# Altium PCB Palletto_PCB.PcbDoc
Units mm, origin at the board's own origin, x right, y up, seen from the top; angles counter-clockwise.
Board outline 270.89 x 250.57 mm, 2 copper layers (Top Layer, Bottom Layer); 58 components, 83 nets, 338 pads, 0 vias.
Unrouted connection lines stored in the file: 9.
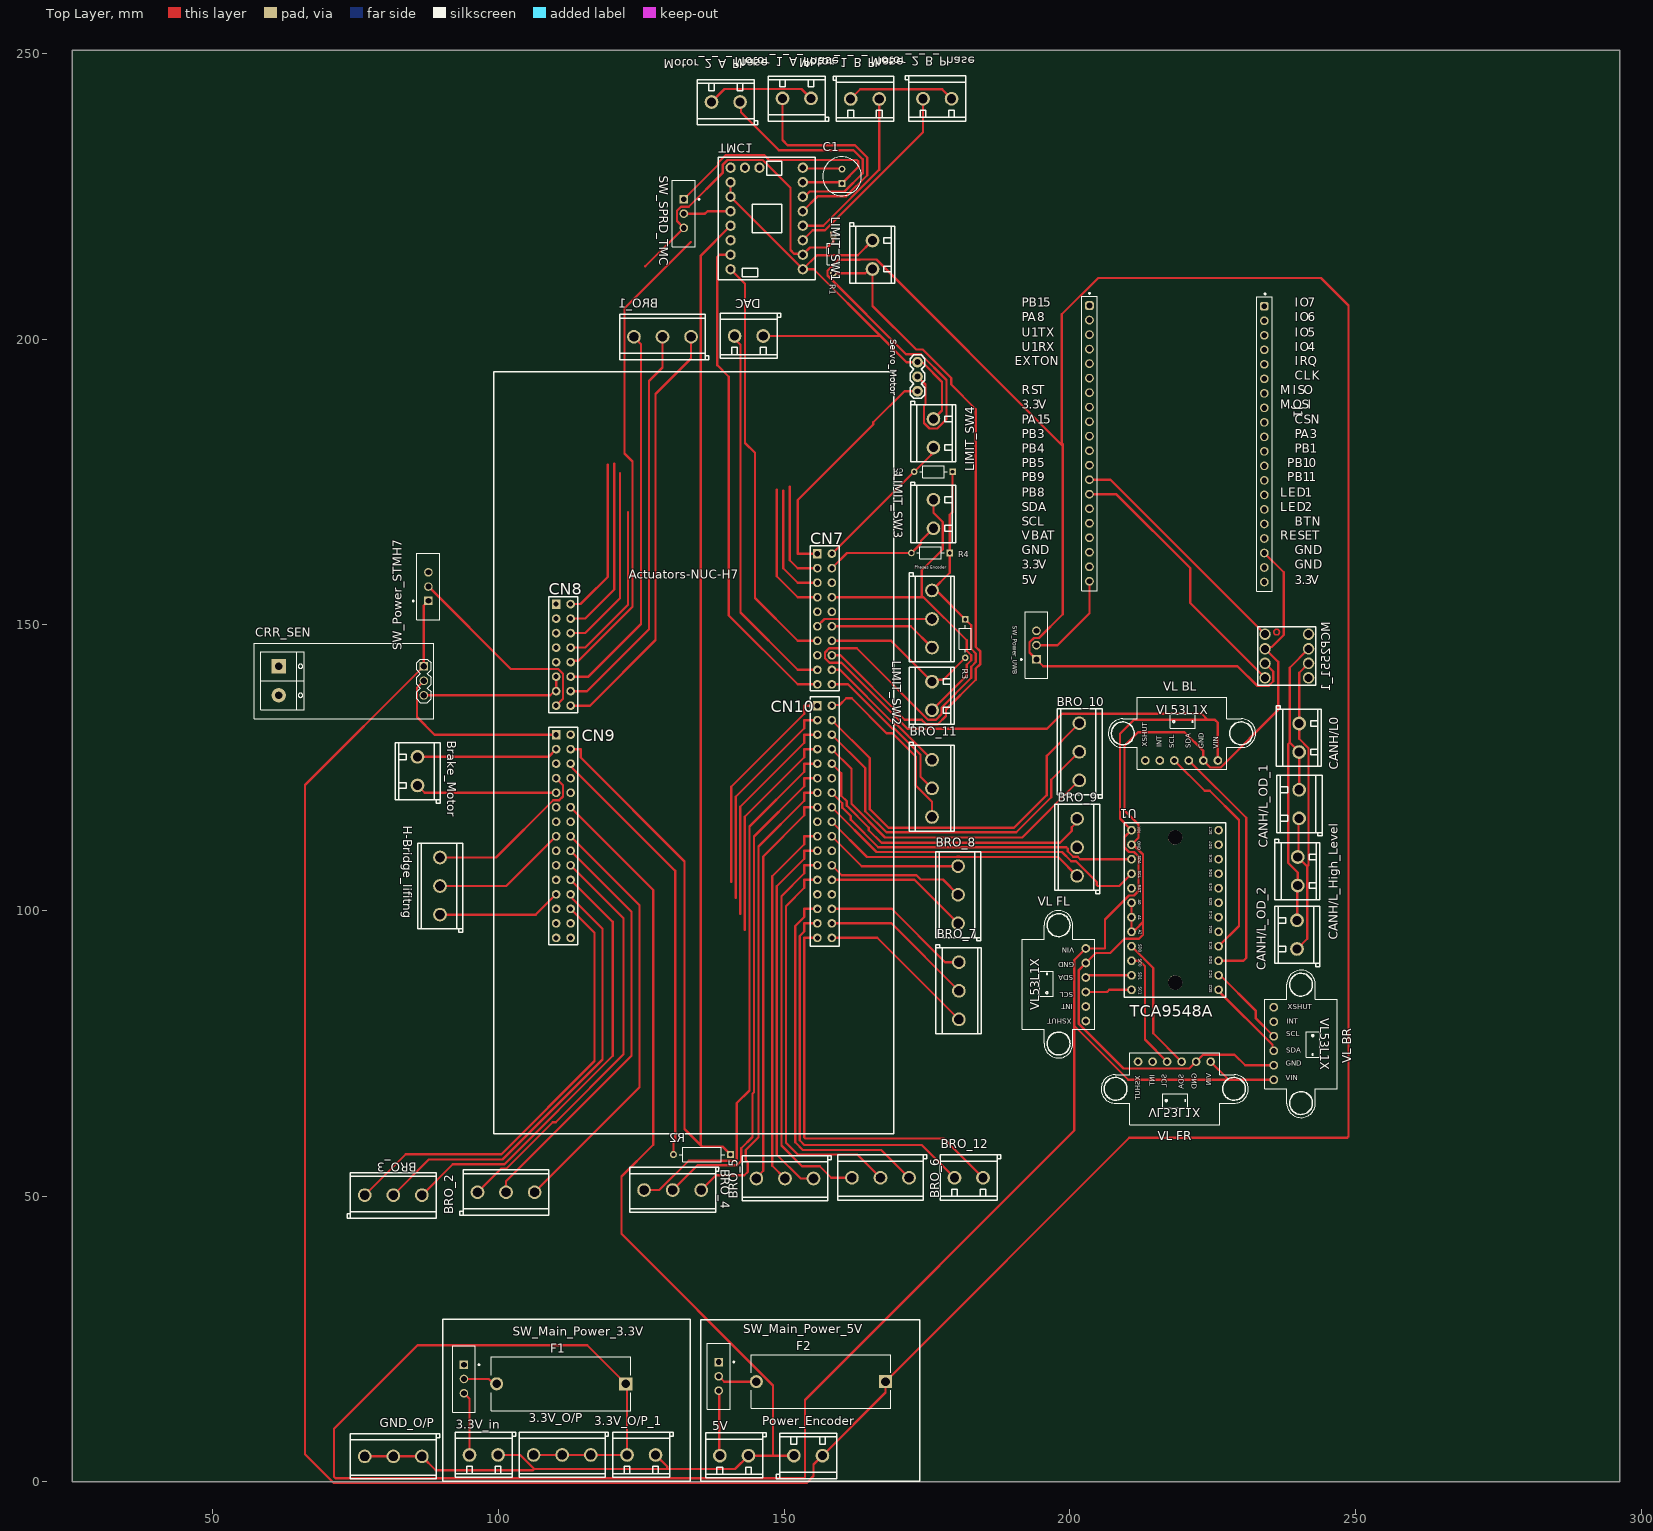
[diagram p0: Top Layer view]
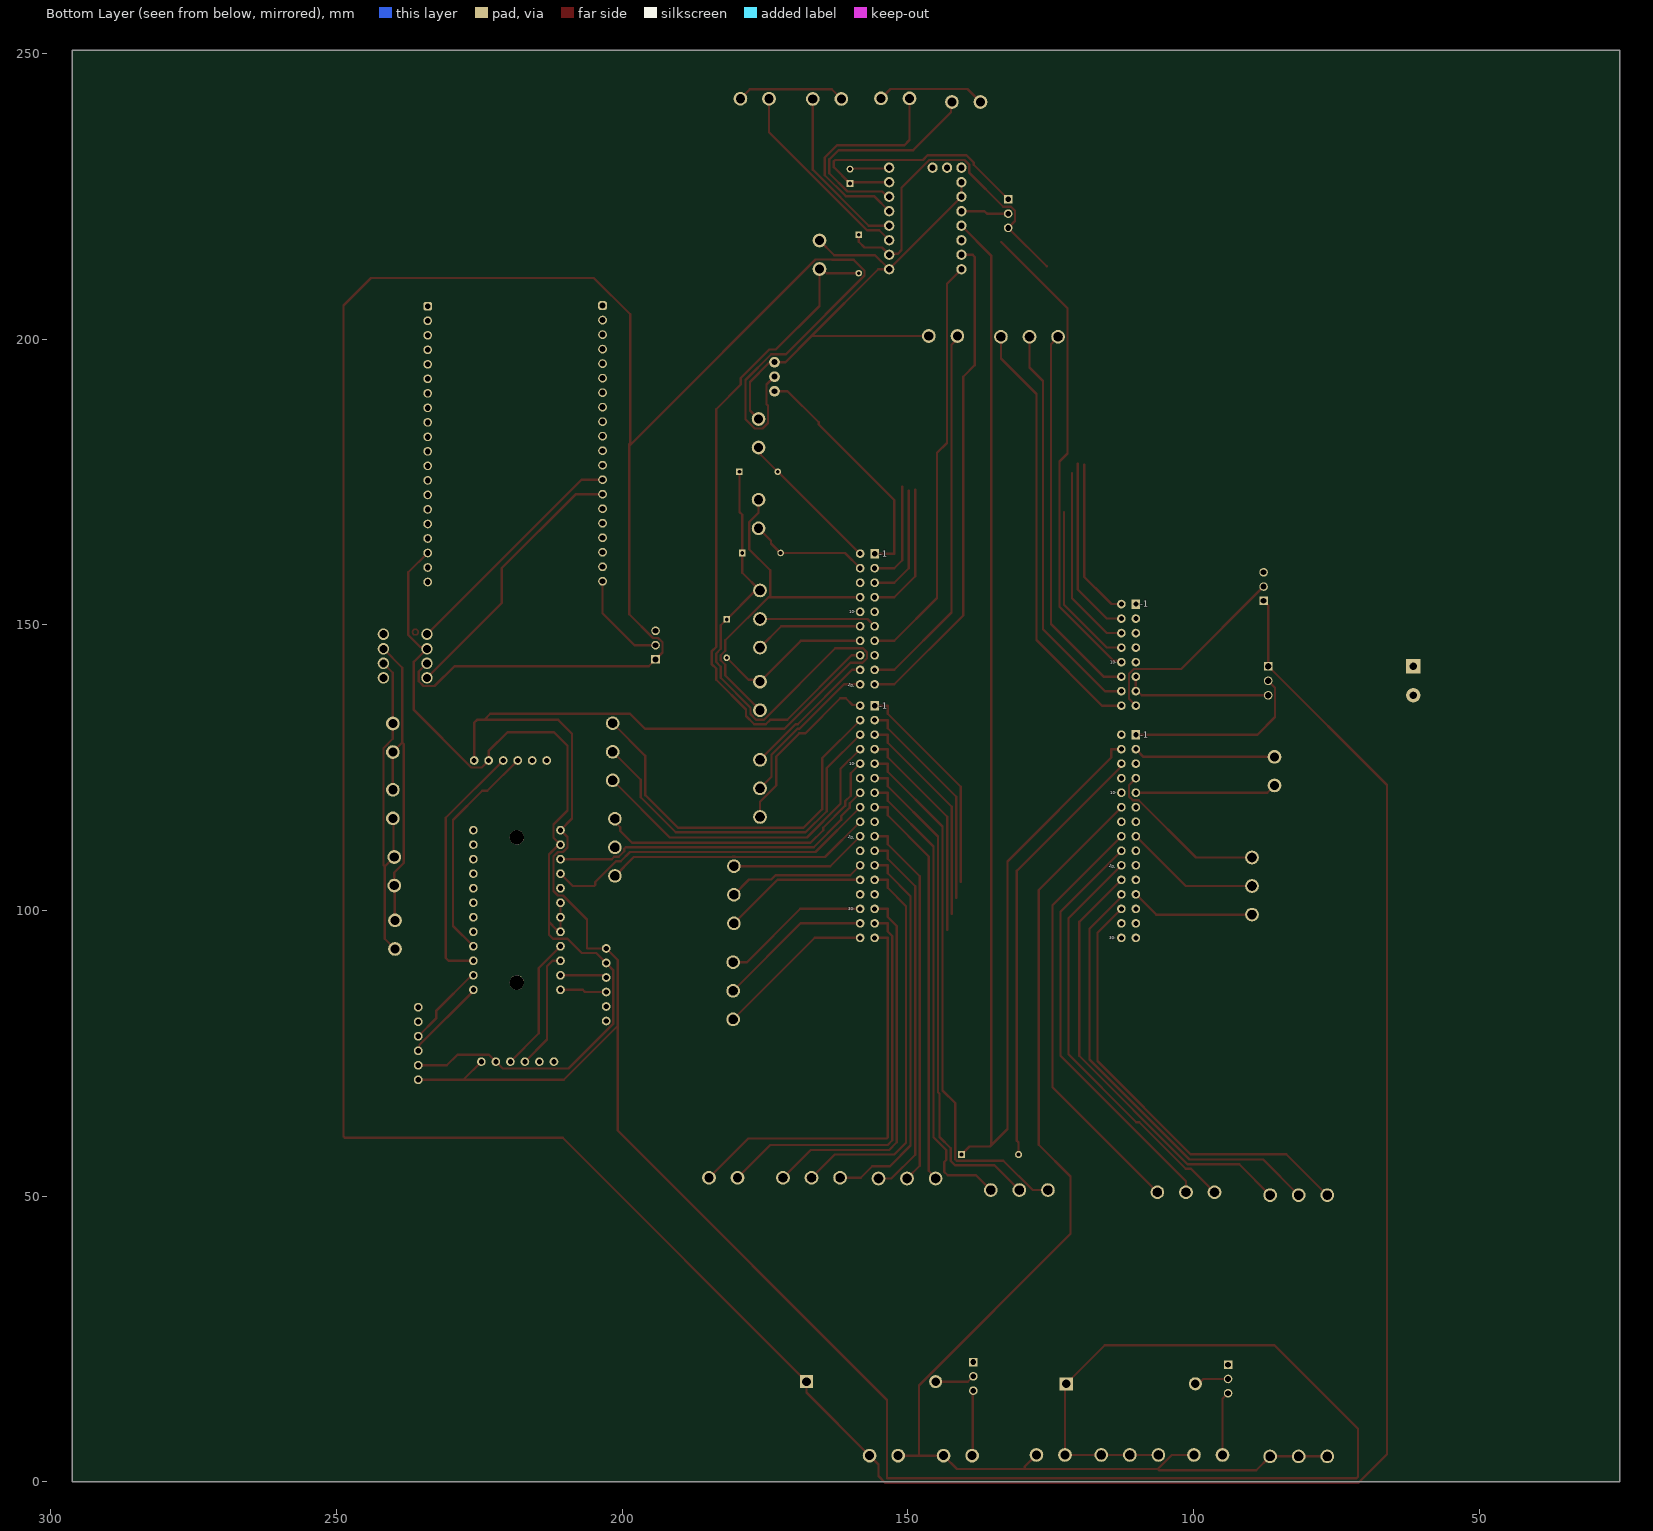
[diagram p1: Bottom Layer view, seen from below]

## Layer stack, top to bottom
Top Solder: solder mask 0.0102, Solder Resist, Dk 3.5
Top Layer: signal copper 0.0356
Dielectric 1: dielectric 0.32, FR-4, Dk 4.8
Bottom Layer: signal copper 0.0356
Bottom Solder: solder mask 0.0102, Solder Resist, Dk 3.5

## Board outline
25.4,250.571 296.291,250.571 296.291,0 25.4,0

## Design rules (kind name [scope] priority, off if disabled: settings)
Clearance [All] p1: gap=0.254 ignorepadtopadclearanceinfootprint=FALSE except(0.4: Arc-Arc Arc-Track Track-Track)
PolygonConnect [All] p1: connectstyle=Relief reliefconductorwidth=0.254 reliefentries=4 polygonreliefangle="90 Angle" airgapwidth=0.254
RoutingLayers [All] p1: top layer_v5=TRUE bottom layer_v5=FALSE
RoutingVias [All] p1: holewidth=0.6 width=1.4 viastyle="Through Hole" minholewidth=0.6 minwidth=1.4 maxholewidth=0.711 maxwidth=1.524
SolderMaskExpansion [All] p1: expansion=0.102 istentingtop=FALSE
Width [All] p1: maxlimit=0.762 minlimit=0.4 preferedwidth=0.4 minimp=50.000000 maximp=50.000000 favimp=50.000000
29 further rules are at their usual default settings.

## Classes and differential pairs
component class Actuators_Schematic: 3.3V_in 3.3V_O/P 3.3V_O/P_1 5V Brake_Motor BRO_1 BRO_2 BRO_3 BRO_4 BRO_5 BRO_6 BRO_7 BRO_8 BRO_9 BRO_10 BRO_11 BRO_12 CANH/L0 CANH/L_High_Level CANH/L_OD_1 CANH/L_OD_2 DAC F1 F2 GND_O/P H-Bridge_lifitng LIMIT_SW1 LIMIT_SW2 LIMIT_SW3 LIMIT_SW4 MCP2551_1 "Phases Encoder" Power_Encoder R1 R3 R4 R5 SW_Main_Power_3.3V SW_Main_Power_5V
component class Sensors_Schematic: C1 CRR_SEN J1 Motor_1_A_Phase Motor_1_B_Phase Motor_2_A_Phase Motor_2_B_Phase Servo_Motor SW_Power_UWB SW_SPRD_TMC TMC1 U1 "VL BL" "VL BR" "VL FL" "VL FR"
component class STM32H755_Breakout_Schematic: Actuators-NUC-H7 R2 SW_Power_STMH7

## Components (designator, comment, footprint, x,y, rotation, side; value= is the part's Value field where it differs from the comment)
3.3V_in "3.3V_In" CONN-TH_P5.00_KF126-5.0-2P 97.449,4.699 r0 top
3.3V_O/P "3P-Terminal" CONN-TH_3P-P5.00_KF126-5.0-3P 111.172,4.699 r0 top
3.3V_O/P_1 "KF126-5.0-2P" CONN-TH_P5.00_KF126-5.0-2P 125.022,4.699 r0 top
5V "KF126-5.0-2P" CONN-TH_P5.00_KF126-5.0-2P 141.264,4.572 r0 top
Actuators-NUC-H7 "NUCLEO-H755ZI-ZIO" NUCLEO-H7 102.489,120.599 r0 top
Brake_Motor "KF126-5.0-2P" CONN-TH_P5.00_KF126-5.0-2P 85.852,124.373 r270 top
BRO_1 "3P-Terminal" CONN-TH_3P-P5.00_KF126-5.0-3P 128.731,200.406 r0 top
BRO_2 "3P-Terminal" CONN-TH_3P-P5.00_KF126-5.0-3P 101.346,50.673 r180 top
BRO_3 "3P-Terminal" CONN-TH_3P-P5.00_KF126-5.0-3P 81.614,50.165 r180 top
BRO_4 "3P-Terminal" CONN-TH_3P-P5.00_KF126-5.0-3P 130.509,51.054 r0 top
BRO_5 "3P-Terminal" CONN-TH_3P-P5.00_KF126-5.0-3P 150.161,53.086 r0 top
BRO_6 "3P-Terminal" CONN-TH_3P-P5.00_KF126-5.0-3P 166.878,53.213 r0 top
BRO_7 "3P-Terminal" CONN-TH_3P-P5.00_KF126-5.0-3P 180.594,85.932 r90 top
BRO_8 "3P-Terminal" CONN-TH_3P-P5.00_KF126-5.0-3P 180.467,102.743 r270 top
BRO_9 "3P-Terminal" CONN-TH_3P-P5.00_KF126-5.0-3P 201.295,111.045 r270 top
BRO_10 "3P-Terminal" CONN-TH_3P-P5.00_KF126-5.0-3P 201.676,127.762 r270 top
BRO_11 "3P-Terminal" CONN-TH_3P-P5.00_KF126-5.0-3P 175.895,121.365 r90 top
BRO_12 "KF126-5.0-2P" CONN-TH_P5.00_KF126-5.0-2P 182.332,53.213 r0 top
C1 "EEUFM1E101B" FP-RAD-TH-D_6_3_0_5-L_11-MFG 160.147,228.493 r90 top
CANH/L0 "KF126-5.0-2P" CONN-TH_P5.00_KF126-5.0-2P 240.157,130.215 r90 top
CANH/L_High_Level "KF126-5.0-2P" CONN-TH_P5.00_KF126-5.0-2P 239.903,106.847 r90 top
CANH/L_OD_1 "KF126-5.0-2P" CONN-TH_P5.00_KF126-5.0-2P 240.157,118.618 r270 top
CANH/L_OD_2 "KF126-5.0-2P" CONN-TH_P5.00_KF126-5.0-2P 239.776,95.758 r270 top
CRR_SEN "CURRENT-SENSOR-ACS712#IC" CURRENT-SENSOR-ACS712#IC 72.985,140.189 r0 top
DAC "KF126-5.0-2P" CONN-TH_P5.00_KF126-5.0-2P 143.851,200.533 r0 top
F1 "0PTF0078P" FP-0PTF0078P-MFG 110.995,17.145 r180 top
F2 "0PTF0078P" FP-0PTF0078P-MFG 156.461,17.526 r180 top
GND_O/P "3P-Terminal" CONN-TH_3P-P5.00_KF126-5.0-3P 81.614,4.445 r0 top
H-Bridge_lifitng "3P-Terminal" CONN-TH_3P-P5.00_KF126-5.0-3P 89.789,104.267 r270 top
J1 "1" 61302011821 212.471,186.817 r0 top
LIMIT_SW1 "LIMIT_SW" CONN-TH_P5.00_KF126-5.0-2P 165.481,214.757 r90 top
LIMIT_SW2 "LIMIT_SW" CONN-TH_P5.00_KF126-5.0-2P 175.895,137.541 r270 top
LIMIT_SW3 "LIMIT_SW" CONN-TH_P5.00_KF126-5.0-2P 176.149,169.378 r90 top
LIMIT_SW4 "LIMIT_SW" CONN-TH_P5.00_KF126-5.0-2P 176.149,183.515 r90 top
MCP2551_1 "8 PIN DIP SOCKET" "DIP 8 PIN SOCKET" 237.998,144.526 r270 top
Motor_1_A_Phase "" CONN-TH_P5.00_KF126-5.0-2P 152.226,242.125 r0 top
Motor_1_B_Phase "" CONN-TH_P5.00_KF126-5.0-2P 164.164,242.025 r180 top
Motor_2_A_Phase "" CONN-TH_P5.00_KF126-5.0-2P 139.813,241.49 r0 top
Motor_2_B_Phase "" CONN-TH_P5.00_KF126-5.0-2P 176.824,242.062 r180 top
"Phases Encoder" "3P-Terminal" CONN-TH_3P-P5.00_KF126-5.0-3P 175.895,151.003 r90 top
Power_Encoder "KF126-5.0-2P" CONN-TH_P5.00_KF126-5.0-2P 154.218,4.572 r180 top
R1 "10K" FP-MFR-12-MFG 158.623,214.884 r270 top
R2 "FMP100JT-52-1K" FP-FMP100-MFG 135.636,57.277 r180 top
R3 "10K" FP-MFR-12-MFG 181.737,147.574 r270 top
R4 "10K" FP-MFR-12-MFG 175.641,162.56 r180 top
R5 "10K" FP-MFR-12-MFG 176.149,176.784 r180 top
Servo_Motor "SMALL_SERVO" 1X03 173.355,190.881 r90 top
SW_Main_Power_3.3V "EG1218" ESWI-EG1218_V 93.98,17.994 r270 top
SW_Main_Power_5V "EG1218" ESWI-EG1218_V 138.557,18.455 r270 top
SW_Power_STMH7 "EG1218" ESWI-EG1218_V 87.757,156.678 r90 top
SW_Power_UWB "EG1218" ESWI-EG1218_V 194.183,146.431 r90 top
SW_SPRD_TMC "EG1218" ESWI-EG1218_V 132.461,221.956 r270 top
TMC1 "TMC2209 Socket" COMM-TH_TMC2209SILENTSTEPSTICK 146.969,221.107 r0 top
U1 "TCA9548A" TCA9548A 218.44,100.076 r0 top
"VL BL" "VL53L1X" VL53L1X_BREAKOUT 213.233,126.238 r0 top
"VL BR" "VL53L1X" VL53L1X_BREAKOUT 235.712,83.058 r270 top
"VL FL" "VL53L1X" VL53L1X_BREAKOUT 202.819,80.645 r90 top
"VL FR" "VL53L1X" VL53L1X_BREAKOUT 211.963,73.533 r0 top

## Footprints (in the part's own frame and the unit in brackets; to place one, negate y for a bottom-side part, rotate by r counter-clockwise, add the part's x,y. Pads: shape width x height; smd on the part's side, far side on the other; paste and mask are expansions set on the pad)
1X03 [mil]
  round 74 hole 40 paste-99999 mask+2: 1(0,0) 2(100,0) 3(200,0)
  silkscreen extent -50,-50 250,50
61302011821 [mm] "Socket Header, Pitch 2.54 mm, THT, Vertical, single row, 20p"
  rrect50% 1.52x1.52 hole 1.02: 1(-9.017,19.05) 21(21.59,18.923)
  round 1.52 hole 1.02: 2(-9.017,16.51) 3(-9.017,13.97) 4(-9.017,11.43) 5(-9.017,8.89) 6(-9.017,6.35) 7(-9.017,3.81) 8(-9.017,1.27) 9(-9.017,-1.27) 10(-9.017,-3.81) 11(-9.017,-6.35) 12(-9.017,-8.89) 13(-9.017,-11.43) 14(-9.017,-13.97) 15(-9.017,-16.51) 16(-9.017,-19.05) 17(-9.017,-21.59) 18(-9.017,-24.13) 19(-9.017,-26.67) 20(-9.017,-29.21) 22(21.59,16.383) 23(21.59,13.843) 24(21.59,11.303) 25(21.59,8.763) 26(21.59,6.223) 27(21.59,3.683) 28(21.59,1.143) 29(21.59,-1.397) 30(21.59,-3.937) 31(21.59,-6.477) 32(21.59,-9.017) 33(21.59,-11.557) 34(21.59,-14.097) 35(21.59,-16.637) 36(21.59,-19.177) 37(21.59,-21.717) 38(21.59,-24.257) 39(21.59,-26.797) 40(21.59,-29.337)
  silkscreen extent -10.37,-30.93 22.97,21.3, body extent -10.27,-30.73 22.86,20.57, height 8.55
COMM-TH_TMC2209SILENTSTEPSTICK [mm]
  round 1.8 hole 1.1 paste-2539.97 mask+0.051: 1(6.32,-8.89) 2(6.32,-6.35) 3(6.32,-3.81) 4(6.32,-1.27) 5(6.32,1.27) 6(6.32,3.81) 7(6.32,6.35) 8(6.32,8.89) 9(-6.32,-8.89) 10(-6.32,-6.35) 11(-6.32,-3.81) 12(-6.32,-1.27) 13(-6.32,1.27) 14(-6.32,3.81) 15(-6.32,6.35) 16(-6.32,8.89) 17(-3.81,8.89) 18(-1.27,8.89)
  silkscreen extent -8.5,-10.7 8.5,10.7
CONN-TH_3P-P5.00_KF126-5.0-3P [mm]
  round 2.4 hole 1.6 slot 1.605 at 0 deg paste-2539.97 mask+0.051: 1(-5,0) 2(0,0) 3(5,0)
  silkscreen extent -7.5,-3.9 8.09,4
CONN-TH_P5.00_KF126-5.0-2P [mm]
  round 2.4 hole 1.6 paste-2539.97 mask+0.102: 1(-2.5,0) 2(2.5,0)
  silkscreen extent -5,-3.9 5.59,4
CURRENT-SENSOR-ACS712#IC [mm]
  rect 1.508x1.508 hole 1 paste-2539.97 mask+0.051: 1(13.97,2.54)
  round 1.508 hole 1 paste-2539.97 mask+0.051: 2(13.97,0) 3(13.97,-2.54)
  rect 2.5x2.5 hole 1.2 slot 1.205 at 0 deg paste-2539.97 mask+0.051: P1.1(-11.43,2.54)
  round 2.5 hole 1.2 slot 1.205 at 0 deg paste-2539.97 mask+0.051: P1.2(-11.43,-2.54)
  silkscreen extent -15.75,-6.6 15.75,6.6
"DIP 8 PIN SOCKET" [mm]
  round 2 hole 1.4 paste-2539.97 mask+0.102: 1(-3.81,-3.81) 2(-1.27,-3.81) 3(1.27,-3.81) 4(3.81,-3.81) 5(3.81,3.81) 6(1.27,3.81) 7(-1.27,3.81) 8(-3.81,3.81)
  Top Layer circle w0.254: c-4.191,-1.778 r0.5
  silkscreen extent -5.08,-5.08 5.08,5.08
ESWI-EG1218_V [mm] "THD, 3-Leads, Body 11.6x4mm, Pitch 2.5mm"
  rect 1.5x1.5 hole 1: 1(-2.5,0)
  round 1.5 hole 1: 2(0,0) 3(2.5,0)
  silkscreen extent -5.8,-2 5.8,2.78, body extent -5.8,-2 5.8,2, height 7.4
FP-0PTF0078P-MFG [mm]
  rect 2.3x2.3 hole 1.5 paste-2539.97 mask+0: 1(-11.3,0)
  round 2.3 hole 1.5 paste-2539.97 mask+0: 2(11.3,0)
  silkscreen extent -12.2,-4.7 12.2,4.7, body extent -12.2,-4.7 12.2,4.7, height 11.5
FP-FMP100-MFG [mm]
  rect 1.25x1.25 hole 0.75 paste-2539.97 mask+0: 1(-5,0)
  round 1.25 hole 0.75 paste-2539.97 mask+0: 2(5,0)
  silkscreen extent -3.98,-1.3 3.98,1.3, body extent -5.28,-1.29 5.28,1.29, height 2.6
FP-MFR-12-MFG [mm]
  rect 1.15x1.15 hole 0.65 paste-2539.97 mask+0: 1(-3.35,0)
  round 1.15 hole 0.65 paste-2539.97 mask+0: 2(3.35,0)
  silkscreen extent -2.38,-1.05 2.38,1.05, body extent -4.03,-1.15 4.03,1.15, height 0.25
FP-RAD-TH-D_6_3_0_5-L_11-MFG [mm]
  rect 1.2x1.2 hole 0.7 paste-2539.97 mask+0: 1(-1.25,0)
  round 1.2 hole 0.7 paste-2539.97 mask+0: 2(1.25,0)
  silkscreen extent -3.4,-3.4 3.4,3.4, body extent -3.5,-3.5 3.5,3.5, height 0.25
NUCLEO-H7 [mm]
  rect 1.52x1.65 hole 0.914 paste-2539.97 mask+0.051: 145(7.62,33.02) 161(7.62,10.16) 191(53.34,41.834) 211(53.34,15.24)
  round 1.52 hole 0.89 paste-2539.97 mask+0.051: 146(10.16,33.02) 147(7.62,30.48) 148(10.16,30.48) 149(7.62,27.94) 150(10.16,27.94) 151(7.62,25.4) 152(10.16,25.4) 153(7.62,22.86) 154(10.16,22.86) 155(7.62,20.32) 156(10.16,20.32) 157(7.62,17.78) 158(10.16,17.78) 159(7.62,15.24) 160(10.16,15.24) 162(10.16,10.16) 163(7.62,7.62) 164(10.16,7.62) 165(7.62,5.08) 166(10.16,5.08) 167(7.62,2.54) 168(10.16,2.54) 169(7.62,0) 170(10.16,0) 171(7.62,-2.54) 172(10.16,-2.54) 173(7.62,-5.08) 174(10.16,-5.08) 175(7.62,-7.62) 176(10.16,-7.62) 177(7.62,-10.16) 178(10.16,-10.16) 179(7.62,-12.7) 180(10.16,-12.7) 181(7.62,-15.24) 182(10.16,-15.24) 183(7.62,-17.78) 184(10.16,-17.78) 185(7.62,-20.32) 186(10.16,-20.32) 187(7.62,-22.86) 188(10.16,-22.86) 189(7.62,-25.4) 190(10.16,-25.4) 192(55.88,41.834) 193(53.34,39.294) 194(55.88,39.294) 195(53.34,36.754) 196(55.88,36.754) 197(53.34,34.214) 198(55.88,34.214) 199(53.34,31.674) 200(55.88,31.674) 201(53.34,29.134) 202(55.88,29.134) 203(53.34,26.594) 204(55.88,26.594) 205(53.34,24.054) 206(55.88,24.054) 207(53.34,21.514) 208(55.88,21.514) 209(53.34,18.974) 210(55.88,18.974) 212(55.88,15.24) 213(53.34,12.7) 214(55.88,12.7) 215(53.34,10.16) 216(55.88,10.16) 217(53.34,7.62) 218(55.88,7.62) 219(53.34,5.08) 220(55.88,5.08) 221(53.34,2.54) 222(55.88,2.54) 223(53.34,0) 224(55.88,0) 225(53.34,-2.54) 226(55.88,-2.54) 227(53.34,-5.08) 228(55.88,-5.08) 229(53.34,-7.62) 230(55.88,-7.62) 231(53.34,-10.16) 232(55.88,-10.16) 233(53.34,-12.7) 234(55.88,-12.7) 235(53.34,-15.24) 236(55.88,-15.24) 237(53.34,-17.78) 238(55.88,-17.78) 239(53.34,-20.32) 240(55.88,-20.32) 241(53.34,-22.86) 242(55.88,-22.86) 243(53.34,-25.4) 244(55.88,-25.4)
  silkscreen extent -3.29,-59.67 66.71,73.67
TCA9548A [mil]
  round 60 hole 36 paste-99999 mask+2: 1(-300,550) 2(-300,450) 3(-300,350) 4(-300,250) 5(-300,150) 6(-300,50) 7(-300,-50) 8(-300,-150) 9(-300,-250) 10(-300,-350) 11(-300,-450) 12(-300,-550) 13(300,-550) 14(300,-450) 15(300,-350) 16(300,-250) 17(300,-150) 18(300,-50) 19(300,50) 20(300,150) 21(300,250) 22(300,350) 23(300,450) 24(300,550)
  round 100 hole 100 unplated paste-99999: ""(0,-500) ""(0,500)
  silkscreen extent -350,-600 350,600
VL53L1X_BREAKOUT [mil]
  round 60 hole 36 paste-99999 mask+4: 1(0,0) 2(100,0) 3(200,0) 4(300,0) 5(400,0) 6(500,0)
  silkscreen extent -255,-61 760,436

## Part data
3.3V_in LIMIT_SW1 LIMIT_SW2 LIMIT_SW3 LIMIT_SW4 Motor_1_A_Phase Motor_1_B_Phase Motor_2_A_Phase Motor_2_B_Phase: library part KF126-5.0-2P, Manufacturer="Cixi Kefa Elec", Contributor=LCSC, Manufacturer Part=KF126-5.0-2P, spicePre=P, spiceSymbolName=KF126-5.0-2P, Supplier=LCSC, Supplier Part=C474900
3.3V_O/P BRO_1 BRO_2 BRO_3 BRO_4 BRO_5 BRO_6 BRO_7 BRO_8 BRO_9 BRO_10 BRO_11 GND_O/P H-Bridge_lifitng "Phases Encoder": library part "Limit Switch", JLCPCB Part Class="Extended Part", Manufacturer="Cixi Kefa Elec", Manufacturer Part=KF126-5.0-3P, Contributor=thulasikrishna, spicePre=U, spiceSymbolName=KF126-5.0-3P, Supplier=LCSC, Supplier Part=C474901
3.3V_O/P_1 5V Brake_Motor BRO_12 CANH/L0 CANH/L_High_Level CANH/L_OD_1 CANH/L_OD_2 DAC Power_Encoder: Manufacturer="Cixi Kefa Elec", Contributor=LCSC, Manufacturer Part=KF126-5.0-2P, spicePre=P, spiceSymbolName=KF126-5.0-2P, Supplier=LCSC, Supplier Part=C474900
Actuators-NUC-H7: Package Display=Yes, Contributor=zutawin, Mounted=Yes, spicePre=X, spiceSymbolName=NUCLEO-H755ZI-ZIO, Supplier=DOLI, Supplier Part=100x
C1: library part CMP-05427-000856-1, "Aluminum Electrolytic Capacitors (Radial Lead Type) 100uF ±20% 25V", Capacitance=100uF, Case/Package=Radial, ESR (Equivalent Series Resistance)=130mR, Max Operating Temperature=105°C, Min Operating Temperature=-40°C, Package Quantity=2000, Ripple Current=455mA, Tolerance=20%, Voltage Rating=25V, Diameter=6mm, Height - Seated (Max)=0.5inch, Impedance=130mR, Lead Diameter=0.5mm, Lead Pitch=5mm, Length=11mm, Life (Hours)=2000Hour, Mount="Through Hole", Packaging="Tape and Reel", Polarity=Polar, RoHS Compliant=Yes, Series=FM, Termination=Radial, Voltage Rating (DC)=25V
F1 F2: library part CMP-08604-000023-1, "FUSE BLOCK CARTRIDGE PCB", Ambient Temperature Range High=+85°C, Ambient Temperature Range Low=-30°C, Fuse Current=6.3A, Manufacturer="Littelfuse Inc", Package=0, Voltage Rating Ac=250V, Automotive=No, Category=Fuse, ComponentLink2Description=Datasheet, ComponentLink2URL=https://media.digikey.com/pdf/Data%20Sheets/Littelfuse%20PDFs/PTF075_77_78.pdf, Conn Orientation=Vertical, Device Class L1="Circuit Protection", Device Class L2="Fuse Holders", Device Class L3=unset, Digikey Description="FUSE BLOCK CARTRIDGE PCB", Height=11.5mm, Lead Free=Yes, Manufacturer Part Number=0PTF0078P, Mouser Description="Fuse Holder 5X20MM Pitch 22/7 UL94V0 Open", Number Of Fuses=1, Octopart=https://octopart.com/0ptf0078p-littelfuse-13255855, RoHS=TRUE, Voltage Rating Dc=250V
J1: library part UWB, "THT Vertical Socket Header WR-PHD, Pitch 2.54 mm, Single Row, 20 pins", Contact Resistance=20mΩ, Current Rating=3A, Operating Supply Voltage=250V, Gender=Female, Lead Pitch=2.54mm, Number of Pins=40, Orientation=Vertical
R1 R3 R4 R5: library part CMP-03413-000012-1, "RES MF 1/6W 1% AXIAL", Max Operating Temperature=155°C, Min Operating Temperature=-55°C, Power Rating=160mW, Resistance=10kR, Tolerance=1%, Voltage Rating=200V, Packaging="Ammo Pack", Termination=Axial, Voltage Rating (DC)=200V
R2: library part CMP-00621-25629781-1, "Resistor, 1 kOhm, ± 5%, 1 W, Axial Leaded, Metal Film, High Power Flame Proof", Case/Package=Conformal, Max Operating Temperature=155°C, Min Operating Temperature=-55°C, Power Rating=1W, Resistance=1kΩ, Temperature Coefficient=100ppm/°C, Tolerance=5%, Composition="Metal Film", Diameter=2.4mm, Lead Free="Lead Free", Length=6.3mm, Military Standard=Not, Mount="Through Hole", Radiation Hardening=No, RoHS=Compliant, Schedule B="8533210090, 8533210090", Termination=Axial
SW_Main_Power_3.3V SW_Main_Power_5V SW_Power_STMH7 SW_Power_UWB SW_SPRD_TMC: library part CMP-1696-00002-1, "Slide Switch, 500 V, -20 to 70 degC, 3-Pin THD, RoHS", Case\Package=SOT-23-5, Dropout Voltage="300 mV", Max Input Voltage="8 V", Max Operating Temperature="85 degC", Max Ouput Current="150 mA", Max Power Dissipation="250 mW", Min Input Voltage="4.3 V", Min Operating Temperature="-40 degC", Nominal Output Voltage="3.3 V", Package Quantity=3000, ComponentLink1Description="Manufacturer URL", ComponentLink1URL=http://www.e-switch.ch/en/, ComponentLink2Description=Datasheet, ComponentLink2URL=https://www.e-switch.com/system/asset/product_line/data_sheet/119/EG.pdf, DatasheetVersion=Oct-15, Height="1.3 mm", Length="3 mm", Mount="Surface Mount", Output Current="150 mA", Output Voltage="3.3 V", Outputs=1, PackageDescription="3-Pin Through Hole Device, Body 11.6 x 4 mm, Pitch 2.5 mm", PackageReference=EG1218, Packaging="Tape and Reel", Pins=5, Power Rating="250 mW", Radiation Hardening=No, REACH SVHC="No SVHC", RoHSCompliant=true, Width="1.8 mm"
TMC1: JLCPCB Part Class="Extended Part", Manufacturer=TRINAMIC, Contributor=plcis, Manufacturer Part="TMC2209 Socket", spicePre=U, spiceSymbolName="TMC2209 Socket", Supplier=LCSC, Supplier Part=C17375345
U1: Manufacturer="Texas Instruments", Contributor=Dompie, link=https://www.adafruit.com/product/2717, Manufacturer Part=TCA9548A, spicePre=U, spiceSymbolName=TCA9548A, Supplier=Adafruit, Supplier Part=2717
"VL BL" "VL BR" "VL FL" "VL FR": library part "VL53L1X_BREAKOUT COPY", Manufacturer Part="VL53L0X Time-of-Flight Distance Sensor VL53L0X", Contributor=freddyka, spicePre=U, spiceSymbolName="VL53L1X_BREAKOUT COPY"
CRR_SEN: Contributor=arenda1234, spicePre=?, spiceSymbolName=CURRENT-SENSOR-ACS712#IC
MCP2551_1: Contributor=uniqengineeringworks, spicePre=U, spiceSymbolName="8 PIN DIP SOCKET", Supplier=LCSC
Servo_Motor: Contributor=hofteboy, spicePre=M, spiceSymbolName=SMALL_SERVO

## Nets (pads, with @x,y where several pads share a name; then routed paths per layer and width w, separated by ;. In a path a pad name is that pad's centre, name@x,y a point inside that pad or via, vN(x,y) a via of type N, cw(c..) or ccw(c..) an arc to the next point about the centre after c; other vN are vias at no path point)
"3.3 V": 3.3V_O/P.1 3.3V_O/P.2 3.3V_O/P.3 3.3V_O/P_1.1 "Phases Encoder.3" "VL BL.6" "VL BR.6" "VL FL.6" "VL FR.6" F1.1 R1.1 R3.1 R4.1 R5.1 SW_SPRD_TMC.3 TMC1.2 U1.1 | length 619.1
  Top Layer w0.4: 3.3V_O/P.1 3.3V_O/P.2 3.3V_O/P.3 3.3V_O/P_1.1 122.522,16.918 F1.1 115.564,23.876 85.852,23.876 71.247,9.271 71.247,0.869 71.481,0.635 153.67,0.635 153.67,14.335 200.803,61.468 200.803,79.81 ; 125.73,212.725 SW_SPRD_TMC.3 131.257,220.66 131.257,222.455 131.962,223.16 132.534,223.16 132.551,223.177 133.324,223.177 139.295,229.148 139.295,230.558 140.088,231.351 146.26,231.351 151.13,226.481 151.13,215.567 151.789,214.908 153.138,214.908 TMC1.2 154.559,216.027 157.627,216.027 158.623,217.023 R1.1 ; R5.1 179.499,169.738 178.991,169.23 R4.1 178.991,159.099 175.895,156.003 176.278,155.62 177.041,155.62 R3.1 182.766,149.895 182.766,145.782 183.566,144.982 183.566,143.466 182.766,142.666 182.766,140.704 177.549,135.487 177.549,134.356 176.58,133.387 175.21,133.387 162.73,145.867 157.866,145.867 157.155,145.156 157.155,144.15 157.978,143.327 160.064,143.327 171.604,131.787 196.032,131.787 198.661,134.416 223.089,134.416 224.155,133.35 ; 224.663,73.533 227.838,70.358 ; 225.933,126.238 225.933,132.842 225.425,133.35 224.155,133.35 ; 235.712,70.358 227.838,70.358 ; 200.803,79.81 200.803,91.329 202.819,93.345 206.179,93.345 206.179,98.425 210.37,102.616 211.27,102.616 212.036,103.382 212.036,109.47 211.27,110.236 210.37,110.236 209.604,111.002 209.604,112.83 U1.1 208.788,116.078 208.788,130.937 211.201,133.35 224.155,133.35 ; 200.803,79.81 210.255,70.358 227.838,70.358
5V: CRR_SEN.1 F2.1 MCP2551_1.3 Power_Encoder.1 Servo_Motor.2 SW_Power_STMH7.1 SW_Power_UWB.1 | length 787.5
  Top Layer w0.4: SW_Power_STMH7.1 86.955,153.376 CRR_SEN.1 66.167,121.94 66.167,4.818 71.15,-0.165 154.001,-0.165 155.168,1.002 155.168,3.022 Power_Encoder.1 167.761,15.615 F2.1 210.433,60.198 248.559,60.198 248.793,60.432 248.793,205.867 243.967,210.693 204.978,210.693 198.611,204.326 198.611,181.754 ; Servo_Motor.2 174.749,192.027 174.749,188.605 174.495,188.351 174.495,185.33 175.464,184.361 176.834,184.361 178.448,185.975 178.448,192.839 173.932,197.355 171.347,197.355 157.594,211.108 157.594,211.96 159.513,213.88 163.235,213.88 163.266,213.911 166.166,213.911 198.611,181.466 198.611,181.754 ; MCP2551_1.3 235.642,141.802 235.642,140.114 234.79,139.262 232.848,139.262 229.362,142.748 195.366,142.748 SW_Power_UWB.1 192.979,145.135 192.979,146.93 193.73,147.681 194.636,147.681 198.793,151.839 198.793,181.572 198.611,181.754
12V: C1.2 TMC1.8 | length 7
  Top Layer w0.4: TMC1.8 153.416,229.87 160.02,229.87 C1.2
ADC_CURRENT_SENSOR: Actuators-NUC-H7.161 CRR_SEN.2 | length 32.5
  Top Layer w0.4: CRR_SEN.2 85.747,138.981 85.747,133.836 88.824,130.759 Actuators-NUC-H7.161
CAN1_RX: J1.14 MCP2551_1.4 | length 47.6
  Top Layer w0.4: J1.14 208.153,172.847 208.279,172.721 221.081,159.919 221.081,153.823 MCP2551_1.4
CAN1_TX: J1.13 MCP2551_1.1 | length 41.9
  Top Layer w0.4: J1.13 207.137,175.387 MCP2551_1.1
DAC: Actuators-NUC-H7.207 DAC.1 | length 66.4
  Top Layer w0.4: DAC.1 141.351,200.019 142.367,199.003 142.367,152.146 152.4,142.113 Actuators-NUC-H7.207
"Encoder A": "Phases Encoder.1" Actuators-NUC-H7.202 | length 19.1
  Top Layer w0.4: Actuators-NUC-H7.202 172.165,149.733 175.895,146.003
"Encoder B": "Phases Encoder.2" Actuators-NUC-H7.201 | length 20.6
  Top Layer w0.4: Actuators-NUC-H7.201 157.099,151.003 175.895,151.003
GND: 3.3V_in.2 3.3V_O/P_1.2 5V.2 "VL BL.5" "VL BR.5" "VL FL.5" "VL FR.5" Actuators-NUC-H7.155 Actuators-NUC-H7.157 Actuators-NUC-H7.172 Actuators-NUC-H7.183 Actuators-NUC-H7.198 C1.1 CRR_SEN.3 DAC.2 GND_O/P.1 GND_O/P.2 GND_O/P.3 H-Bridge_lifitng.3 J1.18 J1.38 LIMIT_SW1.2 LIMIT_SW2.2 LIMIT_SW3.2 LIMIT_SW4.2 MCP2551_1.2 Power_Encoder.2 Servo_Motor.3 SW_SPRD_TMC.1 TMC1.1 TMC1.7 TMC1.14 TMC1.15 U1.2 U1.6 U1.7 U1.8 | length 644.1
  Top Layer w0.4: GND_O/P.1 GND_O/P.2 GND_O/P.3 89.027,2.032 106.074,2.032 106.287,2.245 ; CRR_SEN.3 109.075,137.649 109.806,138.379 Actuators-NUC-H7.157 Actuators-NUC-H7.155 ; H-Bridge_lifitng.3 106.557,99.267 Actuators-NUC-H7.183 ; 3.3V_in.2 103.833,4.699 106.287,2.245 ; Actuators-NUC-H7.172 127.127,103.581 127.127,59.008 121.539,53.42 121.539,43.416 148.082,16.873 148.082,4.572 ; 3.3V_O/P_1.2 129.54,2.681 129.54,2.245 ; SW_SPRD_TMC.1 138.495,230.49 138.495,230.889 139.757,232.151 146.591,232.151 147.391,231.351 162.733,231.351 162.967,231.117 162.967,230.063 C1.1 159.933,227.457 TMC1.7 ; TMC1.15 TMC1.14 140.649,224.887 153.289,212.247 TMC1.1 ; DAC.2 166.867,200.533 ; Power_Encoder.2 148.082,4.572 ; Actuators-NUC-H7.198 174.117,154.813 ; LIMIT_SW1.2 162.904,214.68 155.752,214.68 TMC1.1 ; LIMIT_SW2.2 181.966,141.112 181.966,142.998 182.766,143.798 182.766,144.65 181.966,145.45 181.966,147.271 174.424,154.813 174.117,154.813 ; LIMIT_SW3.2 176.149,169.592 177.803,167.938 177.803,163.218 174.117,159.532 174.117,154.813 ; LIMIT_SW4.2 177.648,187.514 177.648,192.507 174.346,195.809 173.507,195.809 Servo_Motor.3 171.439,195.961 166.867,200.533 ; U1.6 U1.7 U1.8 211.124,96.266 211.54,96.682 211.547,96.682 212.836,97.971 ; J1.38 237.447,159.174 237.447,148.209 235.341,146.102 234.494,146.102 MCP2551_1.2 236.474,143.51 236.474,135.059 226.437,125.022 224.609,125.022 223.393,126.238 223.393,127.889 220.091,131.191 211.943,131.191 209.588,128.836 209.588,117.475 212.036,115.027 212.036,112.722 U1.2 211.035,111.291 211.346,111.291 212.836,109.801 212.836,97.971 ; 235.712,72.898 230.709,72.898 228.858,74.749 223.339,74.749 222.123,73.533 220.907,72.317 209.427,72.317 201.603,80.141 201.603,89.589 202.819,90.805 204.559,92.545 207.099,92.545 209.582,95.028 212.122,95.028 212.836,95.742 212.836,97.971 ; 106.287,2.245 129.54,2.245 ; 129.54,2.245 141.437,2.245 5V.2 148.082,4.572 ; TMC1.1 155.183,212.217 166.867,200.533
I2C_0_SCL: Actuators-NUC-H7.224 U1.3 | length 58.4
  Top Layer w0.4: Actuators-NUC-H7.224 160.198,118.77 160.198,117.993 161.699,116.492 161.699,115.861 166.511,111.049 199.407,111.049 199.641,110.815 199.641,110.36 200.61,109.391 201.42,109.391 201.844,108.966 U1.3
I2C_0_SDA: Actuators-NUC-H7.226 U1.4 | length 59.3
  Top Layer w0.4: Actuators-NUC-H7.226 166.192,110.236 198.633,110.236 200.279,108.591 201.088,108.591 204.724,104.955 204.724,104.501 204.958,104.267 208.661,104.267 U1.4
I2C_1_SCL: "VL FR.3" U1.10 | length 21.1
  Top Layer w0.4: U1.10 212.229,91.186 213.175,90.239 213.175,77.401 217.043,73.533
I2C_1_SDA: "VL FR.4" U1.9 | length 23.8
  Top Layer w0.4: U1.9 214.63,89.916 214.63,78.486 219.583,73.533
I2C_2_SCL: "VL FL.3" U1.12 | length 8.2
  Top Layer w0.4: 202.819,85.725 206.521,85.725 206.902,86.106 U1.12
I2C_2_SDA: "VL FL.4" U1.11 | length 8.2
  Top Layer w0.4: 202.819,88.265 203.123,88.265 203.504,88.646 U1.11
I2C_3_SCL: "VL BR.3" U1.14 | length 14.8
  Top Layer w0.4: U1.14 226.364,88.646 232.537,82.473 232.537,81.153 235.712,77.978
I2C_3_SDA: "VL BR.4" U1.13 | length 14.7
  Top Layer w0.4: U1.13 226.06,85.91 235.497,76.473 235.497,75.653 235.712,75.438
I2C_4_SCL: "VL BL.3" U1.16 | length 39.2
  Top Layer w0.4: 218.313,126.238 223.618,120.933 224.526,120.933 229.616,115.844 229.616,97.282 U1.16
I2C_4_SDA: "VL BL.4" U1.15 | length 43.7
  Top Layer w0.4: 220.853,126.238 230.886,116.205 230.886,91.674 230.398,91.186 U1.15
Lifting_DIR_Pin: Actuators-NUC-H7.167 H-Bridge_lifitng.1 | length 29.6
  Top Layer w0.4: H-Bridge_lifitng.1 99.6,109.267 109.606,119.273 110.637,119.273 111.323,119.959 111.323,121.925 Actuators-NUC-H7.167
Lifting_PWM_Pin: Actuators-NUC-H7.175 H-Bridge_lifitng.2 | length 23.9
  Top Layer w0.4: H-Bridge_lifitng.2 101.397,104.267 Actuators-NUC-H7.175
LM1_PIN: Actuators-NUC-H7.206 LIMIT_SW1.1 R1.2 | length 121.9
  Top Layer w0.4: Actuators-NUC-H7.206 159.87,144.653 171.136,133.387 174.079,133.387 174.879,132.587 176.911,132.587 178.349,134.025 178.349,135.156 183.566,140.373 183.566,142.335 184.366,143.135 184.366,145.313 183.566,146.113 183.566,187.721 179.248,192.039 179.248,193.17 174.264,198.155 173.132,198.155 165.481,205.806 LIMIT_SW1.1 164.94,212.257 164.217,211.534 R1.2
LM2_PIN: Actuators-NUC-H7.204 LIMIT_SW2.1 R3.2 | length 28.1
  Top Layer w0.4: Actuators-NUC-H7.204 168.743,147.193 LIMIT_SW2.1 176.239,140.385 177.898,140.385 R3.2
LM3_PIN: Actuators-NUC-H7.194 LIMIT_SW3.1 R4.2 | length 20.9
  Top Layer w0.4: Actuators-NUC-H7.194 161.036,162.56 R4.2 173.965,164.234 173.965,164.694 LIMIT_SW3.1
LM4_PIN: Actuators-NUC-H7.192 LIMIT_SW4.1 R5.2 | length 26
  Top Layer w0.4: Actuators-NUC-H7.192 158.408,162.433 172.759,176.784 R5.2 175.766,179.751 175.766,180.632 LIMIT_SW4.1
MOTOR_CCW_Pin: Actuators-NUC-H7.169 Brake_Motor.2 | length 24.8
  Top Layer w0.4: Brake_Motor.2 87.126,120.599 Actuators-NUC-H7.169
MOTOR_CW_Pin: Actuators-NUC-H7.163 Brake_Motor.1 | length 24.8
  Top Layer w0.4: Brake_Motor.1 108.763,126.873 Actuators-NUC-H7.163
Net3.3V_in_1: 3.3V_in.1 SW_Main_Power_3.3V.3 | length 11.2
  Top Layer w0.4: SW_Main_Power_3.3V.3 94.949,14.525 3.3V_in.1
Net5V_1: 5V.1 SW_Main_Power_5V.3 | length 11.5
  Top Layer w0.4: SW_Main_Power_5V.3 138.661,15.852 138.661,4.676 5V.1
NetActuators-NUC-H7_159: Actuators-NUC-H7.159 SW_Power_STMH7.2 | length 36
  Top Layer w0.4: SW_Power_STMH7.2 102.19,142.245 110.5,142.245 111.323,141.422 111.323,137.053 Actuators-NUC-H7.159
NetActuators-NUC-H7_166: Actuators-NUC-H7.166 R2.2 | length 76.1
  Top Layer w0.4: Actuators-NUC-H7.166 112.649,125.376 112.982,125.043 112.982,124.889 130.937,106.934 130.937,59.69 130.636,59.389 R2.2
NetCANH/L0_1: CANH/L0.1 CANH/L_High_Level.1 CANH/L_OD_1.1 CANH/L_OD_2.1 MCP2551_1.7 | length 58.7
  Top Layer w0.4: CANH/L_OD_2.1 239.839,98.322 239.839,104.284 CANH/L_High_Level.1 239.903,106.633 238.249,108.287 238.249,129.115 238.503,129.369 ; CANH/L_OD_1.1 CANH/L0.1 238.503,129.369 ; MCP2551_1.7 238.503,142.491 238.503,129.369
NetCANH/L0_2: CANH/L0.2 CANH/L_High_Level.2 CANH/L_OD_1.2 CANH/L_OD_2.2 MCP2551_1.6 | length 61.4
  Top Layer w0.4: CANH/L_OD_2.2 241.557,95.039 241.557,107.693 ; CANH/L_OD_1.2 240.03,115.991 240.03,109.474 CANH/L_High_Level.2 241.557,107.693 ; MCP2551_1.6 240.157,141.605 CANH/L0.2 240.157,130.054 241.811,128.4 241.811,107.947 241.557,107.693
NetF1_2: F1.2 SW_Main_Power_3.3V.2 | length 6.1
  Top Layer w0.4: SW_Main_Power_3.3V.2 98.332,17.994 99.181,17.145 F1.2
NetF2_2: F2.2 SW_Main_Power_5V.2 | length 7
  Top Layer w0.4: SW_Main_Power_5V.2 138.608,18.455 139.537,17.526 F2.2
NetJ1_20: J1.20 SW_Power_UWB.2 | length 17.2
  Top Layer w0.4: SW_Power_UWB.2 197.866,146.431 203.454,152.019 J1.20
NetMotor_1_A_Phase_1: Motor_1_A_Phase.1 TMC1.5 | length 40.4
  Top Layer w0.4: Motor_1_A_Phase.1 149.726,234.83 150.622,233.934 162.413,233.934 164.567,231.779 164.567,228.69 160.897,225.02 155.932,225.02 TMC1.5
NetMotor_1_A_Phase_2: Motor_1_A_Phase.2 Motor_2_A_Phase.1 | length 19
  Top Layer w0.4: Motor_2_A_Phase.1 139.602,243.779 153.072,243.779 Motor_1_A_Phase.2
NetMotor_1_B_Phase_1: Motor_1_B_Phase.1 TMC1.4 | length 30.3
  Top Layer w0.4: TMC1.4 156.846,219.837 166.664,229.655 Motor_1_B_Phase.1 Motor_1_B_Phase.1@166.312,241.673
NetMotor_1_B_Phase_2: Motor_1_B_Phase.2 Motor_2_B_Phase.1 | length 19
  Top Layer w0.4: Motor_1_B_Phase.2 163.355,243.716 177.67,243.716 Motor_2_B_Phase.1
NetMotor_2_A_Phase_2: Motor_2_A_Phase.2 TMC1.6 | length 41.2
  Top Layer w0.4: Motor_2_A_Phase.2 142.453,241.35 142.453,239.69 149.098,233.045 162.17,233.045 163.767,231.448 163.767,229.021 160.566,225.82 154.507,225.82 153.605,224.917 TMC1.6
NetMotor_2_B_Phase_2: Motor_2_B_Phase.2 TMC1.3 | length 34.7
  Top Layer w0.4: TMC1.3 155.029,219.037 157.177,219.037 174.324,236.184 Motor_2_B_Phase.2
NetSW_SPRD_TMC_2: SW_SPRD_TMC.2 TMC1.13 | length 8.4
  Top Layer w0.4: SW_SPRD_TMC.2 136.17,221.956 136.591,222.377 TMC1.13
PA0: Actuators-NUC-H7.239 BRO_6.3 | length 66.3
  Top Layer w0.4: Actuators-NUC-H7.239 153.543,100.279 153.543,98.871 151.943,97.271 151.943,59.423 153.289,58.077 167.014,58.077 BRO_6.3
PA2: Actuators-NUC-H7.221 BRO_4.2 | length 88
  Top Layer w0.4: BRO_4.2 134.853,55.398 141.78,55.398 142.515,56.133 142.515,58.395 144.485,60.366 144.485,67.916 144.743,68.174 144.743,112.931 153.543,121.731 153.543,123.139 Actuators-NUC-H7.221
PA8: Actuators-NUC-H7.214 BRO_10.1 | length 67.9
  Top Layer w0.4: Actuators-NUC-H7.214 165.024,126.644 165.024,117.716 168.275,114.465 190.246,114.465 195.961,120.18 195.961,127.047 BRO_10.1
PB0: Actuators-NUC-H7.241 BRO_12.1 | length 70.4
  Top Layer w0.4: Actuators-NUC-H7.241 153.543,97.739 153.543,96.331 152.743,95.531 152.743,59.754 153.556,58.941 174.104,58.941 BRO_12.1
PB2: Actuators-NUC-H7.225 BRO_5.1 | length 70.7
  Top Layer w0.4: BRO_5.1 145.161,53.268 146.343,54.45 146.343,109.451 153.543,116.651 153.543,118.059 Actuators-NUC-H7.225
PB10: Actuators-NUC-H7.242 BRO_7.2 | length 27.1
  Top Layer w0.4: Actuators-NUC-H7.242 168.787,97.739 BRO_7.2
PB11: Actuators-NUC-H7.244 BRO_7.1 | length 28.1
  Top Layer w0.4: Actuators-NUC-H7.244 166.327,95.199 BRO_7.1
PD2: Actuators-NUC-H7.156 BRO_1.1 | length 66.9
  Top Layer w0.4: Actuators-NUC-H7.156 115.773,140.919 124.968,150.114 124.968,199.097 123.731,200.334 BRO_1.1
PD11: Actuators-NUC-H7.233 BRO_6.1 | length 67.7
  Top Layer w0.4: Actuators-NUC-H7.233 153.543,107.899 153.543,106.491 149.543,102.491 149.543,58.864 153.162,55.245 156.233,55.245 158.265,53.213 BRO_6.1
PD12: Actuators-NUC-H7.231 BRO_5.3 | length 65.6
  Top Layer w0.4: BRO_5.3 152.908,53.086 148.743,57.251 148.743,104.231 153.543,109.031 153.543,110.439 Actuators-NUC-H7.231
PD13: Actuators-NUC-H7.229 BRO_5.2 | length 65.4
  Top Layer w0.4: BRO_5.2 147.943,55.304 147.943,105.971 153.543,111.571 153.543,112.979 Actuators-NUC-H7.229
PD15: Actuators-NUC-H7.208 BRO_11.3 | length 24
  Top Layer w0.4: Actuators-NUC-H7.208 159.778,142.113 169.303,132.587 169.673,132.587 BRO_11.3
PE0: Actuators-NUC-H7.243 BRO_12.2 | length 71.4
  Top Layer w0.4: Actuators-NUC-H7.243 153.543,95.199 153.543,60.32 153.777,60.086 177.959,60.086 BRO_12.2
PE2: Actuators-NUC-H7.235 BRO_6.2 | length 68.7
  Top Layer w0.4: Actuators-NUC-H7.235 153.543,105.359 153.543,103.951 150.343,100.751 150.343,59.334 152.4,57.277 162.814,57.277 BRO_6.2
PE3: Actuators-NUC-H7.182 BRO_3.1 | length 77.4
  Top Layer w0.4: BRO_3.1 92.037,55.588 101.054,55.588 120.015,74.549 120.015,97.993 Actuators-NUC-H7.182
PE4: Actuators-NUC-H7.176 BRO_2.1 | length 74.9
  Top Layer w0.4: BRO_2.1 124.714,69.041 124.714,100.914 Actuators-NUC-H7.176
PE5: Actuators-NUC-H7.178 BRO_2.2 | length 73.3
  Top Layer w0.4: BRO_2.2 101.346,52.585 123.317,74.556 123.317,99.771 Actuators-NUC-H7.178
PE6: Actuators-NUC-H7.180 BRO_2.3 | length 72.5
  Top Layer w0.4: BRO_2.3 100.461,54.788 101.385,54.788 109.54,62.943 110.033,62.943 121.92,74.83 121.92,98.628 Actuators-NUC-H7.180
PE7: Actuators-NUC-H7.230 BRO_8.1 | length 24.3
  Top Layer w0.4: Actuators-NUC-H7.230 163.605,107.743 BRO_8.1
PE8: Actuators-NUC-H7.228 BRO_9.3 | length 46.9
  Top Layer w0.4: Actuators-NUC-H7.228 164.541,109.347 180.063,109.347 cw(c180.467,107.743) 180.871,109.347 197.993,109.347 BRO_9.3
PE10: Actuators-NUC-H7.234 BRO_8.2 | length 24.2
  Top Layer w0.4: Actuators-NUC-H7.234 160.109,106.159 173.182,106.159 173.936,105.405 177.805,105.405 BRO_8.2
PE11: Actuators-NUC-H7.216 BRO_10.2 | length 62.4
  Top Layer w0.4: Actuators-NUC-H7.216 164.224,124.904 164.224,117.361 167.92,113.665 190.627,113.665 196.786,119.824 196.786,122.872 BRO_10.2
PE12: Actuators-NUC-H7.236 BRO_8.3 | length 25.3
  Top Layer w0.4: Actuators-NUC-H7.236 172.851,105.359 BRO_8.3
PE13: Actuators-NUC-H7.220 BRO_9.1 | length 54.1
  Top Layer w0.4: Actuators-NUC-H7.220 160.02,124.028 160.02,120.08 160.998,119.102 160.998,118.325 164.846,114.477 164.846,114.046 167.043,111.849 198.309,111.849 200.347,113.887 200.347,114.555 201.295,115.504 BRO_9.1
PE14: Actuators-NUC-H7.218 BRO_10.3 | length 57.4
  Top Layer w0.4: Actuators-NUC-H7.218 161.798,124.79 161.798,118.656 167.678,112.776 191.69,112.776 BRO_10.3
PE15: Actuators-NUC-H7.240 BRO_7.3 | length 26.1
  Top Layer w0.4: Actuators-NUC-H7.240 168.834,100.279 178.181,90.932 BRO_7.3
PF7: Actuators-NUC-H7.186 BRO_3.3 | length 78.3
  Top Layer w0.4: BRO_3.3 83.778,57.329 100.532,57.329 116.84,73.637 116.84,96.088 Actuators-NUC-H7.186
PF8: Actuators-NUC-H7.184 BRO_3.2 | length 77.7
  Top Layer w0.4: BRO_3.2 87.837,56.388 100.723,56.388 118.237,73.902 118.237,96.774 112.982,102.029 112.982,102.183 112.649,102.516 Actuators-NUC-H7.184
PF10: Actuators-NUC-H7.219 BRO_4.1 | length 94.8
  Top Layer w0.4: BRO_4.1 128.17,51.054 133.314,56.198 141.449,56.198 141.715,56.464 141.715,66.277 143.943,68.505 143.943,114.671 153.543,124.271 153.543,125.679 Actuators-NUC-H7.219
PG6: Actuators-NUC-H7.223 BRO_4.3 | length 82.5
  Top Layer w0.4: BRO_4.3 138.084,53.629 143.047,53.629 143.65,54.232 143.65,55.98 143.315,56.315 143.315,58.064 145.543,60.292 145.543,111.191 153.543,119.191 153.543,120.599 Actuators-NUC-H7.223
PG8: Actuators-NUC-H7.160 BRO_1.3 | length 75.3
  Top Layer w0.4: Actuators-NUC-H7.160 116.027,135.839 127.508,147.32 127.508,190.373 133.731,196.596 BRO_1.3
PG9: Actuators-NUC-H7.210 BRO_11.2 | length 27.3
  Top Layer w0.4: Actuators-NUC-H7.210 161.186,139.573 168.972,131.787 169.341,131.787 173.869,127.26 173.869,123.391 BRO_11.2
PG10: Actuators-NUC-H7.158 BRO_1.2 | length 70.4
  Top Layer w0.4: Actuators-NUC-H7.158 115.519,138.379 126.365,149.225 126.365,192.659 128.731,195.025 BRO_1.2
PG12: Actuators-NUC-H7.212 BRO_11.1 | length 31.2
  Top Layer w0.4: Actuators-NUC-H7.212 158.485,135.955 159.729,135.955 160.895,137.121 161.837,137.121 167.971,130.987 169.01,130.987 173.049,126.948 173.049,121.872 175.895,119.026 BRO_11.1
Servo: Actuators-NUC-H7.191 Servo_Motor.1 | length 41.9
  Top Layer w0.4: Actuators-NUC-H7.191 152.4,162.433 152.4,171.831 165.608,185.039 165.608,185.42 171.069,190.881 Servo_Motor.1
TMC_Dir: Actuators-NUC-H7.203 TMC1.9 | length 73.3
  Top Layer w0.4: TMC1.9 143.167,209.699 143.167,181.826 144.907,180.086 144.907,154.686 152.4,147.193 Actuators-NUC-H7.203
TMC_EN: Actuators-NUC-H7.154 TMC1.16 | length 84
  Top Layer w0.4: Actuators-NUC-H7.154 112.863,143.673 113.995,143.673 123.482,153.161 123.482,178.57 122.077,179.975 122.077,205.384 133.665,216.971
TMC_Step: Actuators-NUC-H7.209 TMC1.10 | length 86.6
  Top Layer w0.4: TMC1.10 138.684,214.757 138.303,214.376 138.303,195.438 140.335,193.406 140.335,151.638 152.4,139.573 Actuators-NUC-H7.209
TMC_UART: Actuators-NUC-H7.164 R2.1 TMC1.12 | length 248.8
  Top Layer w0.4: Actuators-NUC-H7.164 114.427,128.219 114.427,126.746 132.588,108.585 132.588,61.722 135.445,58.864 ; R2.1 139.239,58.674 135.636,58.674 135.445,58.864 ; TMC1.12 135.445,214.633 135.445,58.864
pads on no net: "VL BL.1" "VL BL.2" "VL BR.1" "VL BR.2" "VL FL.1" "VL FL.2" "VL FR.1" "VL FR.2" Actuators-NUC-H7.145 Actuators-NUC-H7.146 Actuators-NUC-H7.147 Actuators-NUC-H7.148 Actuators-NUC-H7.149 Actuators-NUC-H7.150 Actuators-NUC-H7.151 Actuators-NUC-H7.152 Actuators-NUC-H7.153 Actuators-NUC-H7.162 Actuators-NUC-H7.165 Actuators-NUC-H7.168 Actuators-NUC-H7.170 Actuators-NUC-H7.171 Actuators-NUC-H7.173 Actuators-NUC-H7.174 Actuators-NUC-H7.177 Actuators-NUC-H7.179 Actuators-NUC-H7.181 Actuators-NUC-H7.185 Actuators-NUC-H7.187 Actuators-NUC-H7.188 Actuators-NUC-H7.189 Actuators-NUC-H7.190 Actuators-NUC-H7.193 Actuators-NUC-H7.195 Actuators-NUC-H7.196 Actuators-NUC-H7.197 Actuators-NUC-H7.199 Actuators-NUC-H7.200 Actuators-NUC-H7.205 Actuators-NUC-H7.211 Actuators-NUC-H7.213 Actuators-NUC-H7.215 Actuators-NUC-H7.217 Actuators-NUC-H7.222 Actuators-NUC-H7.227 Actuators-NUC-H7.232 Actuators-NUC-H7.237 Actuators-NUC-H7.238 BRO_9.2 CRR_SEN.P1.1 CRR_SEN.P1.2 J1.1 J1.2 J1.3 J1.4 J1.5 J1.6 J1.7 J1.8 J1.9 J1.10 J1.11 J1.12 J1.15 J1.16 J1.17 J1.19 J1.21 J1.22 J1.23 J1.24 J1.25 J1.26 J1.27 J1.28 J1.29 J1.30 J1.31 J1.32 J1.33 J1.34 J1.35 J1.36 J1.37 J1.39 J1.40 MCP2551_1.5 MCP2551_1.8 SW_Main_Power_3.3V.1 SW_Main_Power_5V.1 SW_Power_STMH7.3 SW_Power_UWB.3 TMC1.11 TMC1.17 TMC1.18 U1. U1.5 U1.17 U1.18 U1.19 U1.20 U1.21 U1.22 U1.23 U1.24
copper on no net: | length 338.3
  Top Layer w0.4: 112.649,145.999 115.189,145.999 122.682,153.492 122.682,169.718 ; 112.649,148.539 115.189,148.539 121.285,154.635 121.285,176.529 ; 112.649,151.079 115.189,151.079 120.269,156.159 120.269,178.174 ; 112.649,153.619 114.376,153.619 115.443,154.686 119.126,158.369 119.126,178.012 ; 140.743,104.963 140.743,121.631 153.543,134.431 153.543,135.839 155.829,135.839 ; 141.543,102.17 141.543,119.891 153.543,131.891 153.543,133.299 155.829,133.299 ; 142.343,99.378 142.343,118.151 153.543,129.351 153.543,130.759 155.829,130.759 ; 143.143,96.586 143.143,116.411 153.543,126.811 153.543,128.219 155.829,128.219 ; 148.717,173.622 148.717,158.496 152.4,154.813 155.829,154.813 ; 149.86,173.453 149.86,159.893 152.4,157.353 155.829,157.353 ; 151.003,174.183 151.003,161.29 152.4,159.893 155.829,159.893

## Silkscreen, mask and mechanical layers (free items; w line width, h text height)
Top Overlay:
  lines w0.254: 90.297,0.127 133.604,0.127 133.604,28.448 90.297,28.448 90.297,0.127 ; 135.382,0.127 173.736,0.127 173.736,28.321 135.382,28.321 135.382,0.127

## Text inside footprints (layer, text, board x,y; h text height)
Actuators-NUC-H7: Top Overlay "CN9" at 114.579,129.565 h2.03; Top Overlay "CN10" at 147.65,134.645 h2.03; Top Overlay "CN7" at 154.559,164.084 h2.03; Top Overlay "CN8" at 108.839,155.27 h2.03; Bottom Overlay "30-" at 114.791,94.949 h0.5 r2; Bottom Overlay "20-" at 114.876,107.667 h0.5 r22; Bottom Overlay "10-" at 114.579,120.349 h0.5; Bottom Overlay "-1" at 109.322,130.259 h1; Bottom Overlay "30-" at 160.435,100.029 h0.5 r2; Bottom Overlay "20-" at 160.52,112.747 h0.5 r22; Bottom Overlay "10-" at 160.249,125.429 h0.5; Bottom Overlay "-1" at 155.042,135.339 h1; Bottom Overlay "10-" at 114.579,143.209 h0.5; Bottom Overlay "-1" at 109.322,153.119 h1; Bottom Overlay "-1" at 155.042,161.933 h1; Bottom Overlay "20-" at 160.571,139.316 h0.5 r22; Bottom Overlay "10-" at 160.299,151.998 h0.5
J1: Top Overlay "B" at 192.869,179.596 h2.61; Top Overlay "B" at 192.869,182.111 h2.61; Top Overlay "4" at 194.306,179.596 h2.61; Top Overlay "P" at 191.611,179.596 h2.61; Top Overlay "3" at 194.306,182.111 h2.61; Top Overlay "P" at 191.611,182.111 h2.61; Top Overlay "A" at 192.689,184.626 h2.61; Top Overlay "P" at 191.611,184.626 h2.61; Top Overlay "L" at 194.306,166.843 h2.61; Top Overlay "C" at 192.869,166.843 h2.61; Top Overlay "S" at 191.611,166.843 h2.61; Top Overlay "5" at 195.384,205.104 h2.61; Top Overlay "X" at 195.922,199.894 h2.61; Top Overlay "T" at 194.485,199.894 h2.61; Top Overlay "U" at 191.611,199.894 h2.61; Top Overlay "8" at 194.306,202.589 h2.61; Top Overlay "A" at 192.689,202.589 h2.61; Top Overlay "P" at 191.611,202.589 h2.61; Top Overlay "B" at 192.869,205.104 h2.61; Top Overlay "P" at 191.611,205.104 h2.61; Top Overlay "V" at 192.869,156.604 h2.61; Top Overlay "3" at 191.611,159.298 h2.61; Top Overlay "5" at 191.611,156.604 h2.61; Top Overlay "V" at 194.485,159.298 h2.61; Top Overlay "3" at 193.408,159.298 h2.61; Top Overlay "D" at 194.845,161.813 h2.61; Top Overlay "N" at 193.228,161.813 h2.61; Top Overlay "G" at 191.611,161.813 h2.61; Top Overlay "T" at 196.102,164.328 h2.61; Top Overlay "A" at 194.845,164.328 h2.61; Top Overlay "B" at 193.228,164.328 h2.61; Top Overlay "V" at 191.611,164.328 h2.61; Top Overlay "D" at 192.869,169.357 h2.61; Top Overlay "8" at 194.306,171.872 h2.61; Top Overlay "A" at 194.485,169.357 h2.61; Top Overlay "S" at 191.611,169.357 h2.61; Top Overlay "B" at 192.869,171.872 h2.61; Top Overlay "P" at 191.611,171.872 h2.61; Top Overlay "9" at 194.306,174.567 h2.61; Top Overlay "B" at 192.869,174.567 h2.61; Top Overlay "P" at 191.611,174.567 h2.61; Top Overlay "5" at 194.306,177.081 h2.61; Top Overlay "B" at 192.869,177.081 h2.61; Top Overlay "P" at 191.611,177.081 h2.61; Top Overlay "5" at 195.384,184.626 h2.61; Top Overlay "T" at 194.306,189.835 h2.61; Top Overlay "V" at 194.485,187.32 h2.61; Top Overlay "3" at 193.408,187.32 h2.61; Top Overlay "3" at 191.611,187.32 h2.61; Top Overlay "S" at 193.228,189.835 h2.61; Top Overlay "R" at 191.611,189.835 h2.61; Top Overlay "N" at 196.465,194.865 h2.61; Top Overlay "X" at 195.922,197.38 h2.61; Top Overlay "O" at 194.848,194.865 h2.61; Top Overlay "T" at 193.411,194.865 h2.61; Top Overlay "X" at 191.794,194.865 h2.61; Top Overlay "E" at 190.357,194.865 h2.61; Top Overlay "R" at 194.485,197.38 h2.61; Top Overlay "U" at 191.611,197.38 h2.61; Top Overlay "V" at 242.222,156.604 h2.61; Top Overlay "3" at 241.144,156.604 h2.61; Top Overlay "3" at 239.347,156.604 h2.61; Top Overlay "D" at 242.581,159.298 h2.61; Top Overlay "N" at 240.964,159.298 h2.61; Top Overlay "G" at 239.347,159.298 h2.61; Top Overlay "D" at 242.581,161.813 h2.61; Top Overlay "N" at 240.964,161.813 h2.61; Top Overlay "G" at 239.347,161.813 h2.61; Top Overlay "I" at 239.347,199.894 h2.61; Top Overlay "4" at 241.683,197.38 h2.61; Top Overlay "O" at 240.246,197.38 h2.61; Top Overlay "I" at 239.347,197.38 h2.61; Top Overlay "5" at 241.683,199.894 h2.61; Top Overlay "O" at 240.246,199.894 h2.61; Top Overlay "6" at 241.683,202.589 h2.61; Top Overlay "O" at 240.246,202.589 h2.61; Top Overlay "I" at 239.347,202.589 h2.61; Top Overlay "7" at 241.683,205.104 h2.61; Top Overlay "O" at 240.246,205.104 h2.61; Top Overlay "I" at 239.347,205.104 h2.61; Top Overlay "T" at 242.408,164.328 h2.61; Top Overlay "T" at 240.964,166.843 h2.61; Top Overlay "E" at 241.15,164.328 h2.61; Top Overlay "S" at 239.893,164.328 h2.61; Top Overlay "E" at 238.456,164.328 h2.61; Top Overlay "R" at 236.839,164.328 h2.61; Top Overlay "N" at 242.401,166.843 h2.61; Top Overlay "B" at 239.347,166.843 h2.61; Top Overlay "D" at 239.713,169.357 h2.61; Top Overlay "2" at 241.15,169.357 h2.61; Top Overlay "E" at 238.276,169.357 h2.61; Top Overlay "L" at 236.839,169.357 h2.61; Top Overlay "D" at 239.713,171.872 h2.61; Top Overlay "E" at 238.276,171.872 h2.61; Top Overlay "L" at 236.839,171.872 h2.61; Top Overlay "B" at 239.351,174.567 h2.61; Top Overlay "P" at 238.093,174.567 h2.61; Top Overlay "B" at 239.351,177.081 h2.61; Top Overlay "P" at 238.093,177.081 h2.61; Top Overlay "P" at 239.347,179.596 h2.61; Top Overlay "0" at 241.866,177.081 h2.61; Top Overlay "N" at 242.222,184.626 h2.61; Top Overlay "B" at 240.605,179.596 h2.61; Top Overlay "3" at 242.042,182.111 h2.61; Top Overlay "A" at 240.425,182.111 h2.61; Top Overlay "P" at 239.347,182.111 h2.61; Top Overlay "S" at 240.964,184.626 h2.61; Top Overlay "C" at 239.347,184.626 h2.61; Top Overlay "I" at 241.689,187.32 h2.61; Top Overlay "S" at 240.611,187.32 h2.61; Top Overlay "O" at 238.995,187.32 h2.61; Top Overlay "M" at 236.839,187.32 h2.61; Top Overlay "I" at 238.995,189.835 h2.61; Top Overlay "O" at 240.971,189.835 h2.61; Top Overlay "S" at 239.893,189.835 h2.61; Top Overlay "M" at 236.839,189.835 h2.61; Top Overlay "K" at 242.401,192.35 h2.61; Top Overlay "L" at 240.964,192.35 h2.61; Top Overlay "C" at 239.347,192.35 h2.61; Top Overlay "Q" at 241.683,194.865 h2.61; Top Overlay "R" at 240.246,194.865 h2.61; Top Overlay "I" at 239.347,194.865 h2.61
U1: Top Overlay "SD6" at 224.917,105.791 h0.51 r90; Top Overlay "SC6" at 224.917,108.331 h0.51 r90; Top Overlay "SD7" at 224.917,110.744 h0.51 r90; Top Overlay "SC7" at 224.917,113.284 h0.51 r90; Top Overlay "SD4" at 224.917,95.885 h0.51 r90; Top Overlay "SC4" at 224.917,98.425 h0.51 r90; Top Overlay "SD5" at 224.917,100.838 h0.51 r90; Top Overlay "SC5" at 224.917,103.378 h0.51 r90; Top Overlay "SD3" at 224.917,90.551 h0.51 r90; Top Overlay "SC2" at 224.917,88.138 h0.51 r90; Top Overlay "SD2" at 224.917,85.598 h0.51 r90; Top Overlay "SC3" at 224.917,93.091 h0.51 r90; Top Overlay "SC1" at 212.09,86.614 h0.51 r270; Top Overlay "SD1" at 212.09,89.154 h0.51 r270; Top Overlay "SC0" at 212.09,91.567 h0.51 r270; Top Overlay "SD0" at 212.09,94.107 h0.51 r270; Top Overlay "A2" at 212.09,96.647 h0.51 r270; Top Overlay "A1" at 211.963,99.187 h0.51 r270; Top Overlay "A0" at 211.963,101.854 h0.51 r270; Top Overlay "RST" at 211.963,104.521 h0.51 r270; Top Overlay "SCL" at 211.963,106.934 h0.51 r270; Top Overlay "SDA" at 211.963,109.601 h0.51 r270; Top Overlay "GND" at 211.917,112.141 h0.51 r270; Top Overlay "VIN" at 211.917,114.681 h0.51 r270
"VL BL": Top Overlay "INT" at 216.129,128.549 h0.89 r90; Top Overlay "SDA" at 221.209,128.422 h0.89 r90; Top Overlay "SCL" at 218.288,128.422 h0.89 r90; Top Overlay "GND" at 223.495,128.295 h0.89 r90; Top Overlay "VIN" at 226.035,128.295 h0.89 r90; Top Overlay "XSHUT" at 213.589,128.676 h0.89 r90
"VL BR": Top Overlay "INT" at 238.023,80.162 h0.89; Top Overlay "SDA" at 237.896,75.082 h0.89; Top Overlay "SCL" at 237.896,78.003 h0.89; Top Overlay "GND" at 237.769,72.796 h0.89; Top Overlay "VIN" at 237.769,70.256 h0.89; Top Overlay "XSHUT" at 238.15,82.702 h0.89
"VL FL": Top Overlay "INT" at 200.508,83.541 h0.89 r180; Top Overlay "SDA" at 200.635,88.621 h0.89 r180; Top Overlay "SCL" at 200.635,85.7 h0.89 r180; Top Overlay "GND" at 200.762,90.907 h0.89 r180; Top Overlay "VIN" at 200.762,93.447 h0.89 r180; Top Overlay "XSHUT" at 200.381,81.001 h0.89 r180
"VL FR": Top Overlay "INT" at 214.859,71.222 h0.89 r90; Top Overlay "SDA" at 219.939,71.349 h0.89 r90; Top Overlay "SCL" at 217.018,71.349 h0.89 r90; Top Overlay "GND" at 222.225,71.476 h0.89 r90; Top Overlay "VIN" at 224.765,71.476 h0.89 r90; Top Overlay "XSHUT" at 212.319,71.095 h0.89 r90